# Allegro board msd_foot_ext1.brd
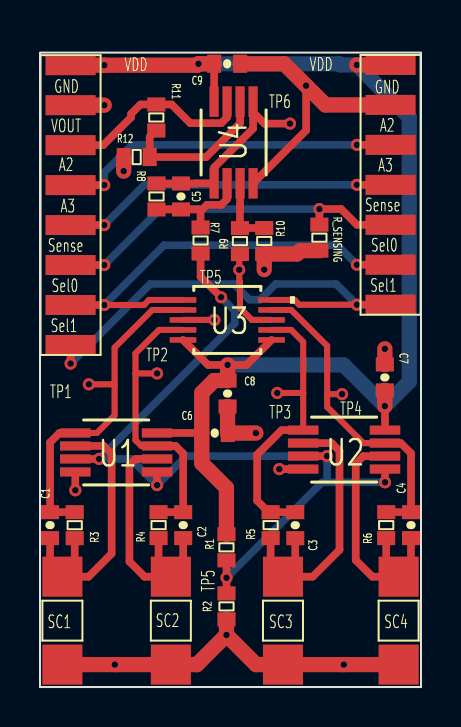
[diagram p0: board, top side]
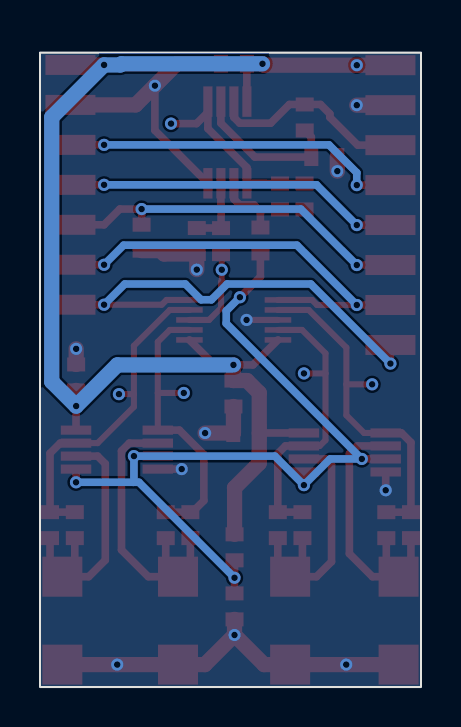
[diagram p1: board, bottom side, seen from below]

Outline 19.05 x 31.75 mm; copper layers: TOP, BOTTOM. Coordinates in mm from the lower left corner of the outline.
Outline path: rectangle 0,0 19.05,31.75

## Design rules (mm)
constraint set DEFAULT: min track width 0.381

## Placement (name value [footprint] x y rotation side)
C1  47pF  [0402-CAP]  0.5 8.1 90 top
C2  47pF  [0402-CAP]  7.16 8.1 90 top
C3  47pF  [0402-CAP]  12.76 8.1 90 top
C4  47pF  [0402-CAP]  18.55 8.1 90 top
C5  470p  [0402-CAP]  7.05 24.55 90 top
C6  0.1u  [0402-CAP]  8.74 12.71 180 top
C7  0.1u  [0402-CAP]  17.24 15.49 270 top
C8  0.1u  [0402-CAP]  9.38 14.69 90 top
C9  0.1uF  [0402-CAP]  9.36 31.19 0 top
IO1  -  [EXT1_MAIN_CONNECTOR]  1.53 24.12 0 top
IO2  -  [EXT1_EXT2_CONNECTOR]  17.53 25.13 0 top
NOREF  -  []  -36.31 -137.95 0 top
NOREF#2  -  []  19.05 0 90 top
NOREF#3  -  []  0.01 31.74 0 top
R1  10k  [0402-RES]  9.32 6.99 90 top
R2  1k  [0402-RES]  9.32 4.04 90 top
R3  20k  [0402-RES]  1.73 8.1 90 top
R4  20k  [0402-RES]  5.93 8.1 90 top
R5  20k  [0402-RES]  11.53 8.1 90 top
R6  20k  [0402-RES]  17.31 8.1 90 top
R7  100k  [0402-RES]  8.03 22.35 270 top
R8  100k  [0402-RES]  5.82 24.55 270 top
R9  100k  [0402-RES]  10 22.32 90 top
R10  120k  [0402-RES]  11.21 22.32 90 top
R11  20k  [0402-RES]  5.81 28.5 270 top
R12  10k  [0402-RES]  4.83 26.52 0 top
R_SENSING  5k  [0402-RES]  13.97 22.49 270 top
SC1  Strain Cell  [STRAIN_CELL]  1.12 3.32 90 top
SC2  Strain Cell  [STRAIN_CELL]  6.54 3.32 90 top
SC3  Strain Cell  [STRAIN_CELL]  12.15 3.32 90 top
SC4  Strain Cell  [STRAIN_CELL]  17.93 3.32 90 top
U1  MCP6002-IMS  [MSOP8_MC_MCH]  3.81 11.74 0 top
U2  MCP6002-IMS  [MSOP8_MC_MCH]  15.2 11.88 0 top
U3  TMUX1104DGSR  [DGS10_TEX]  9.36 18.37 0 top
U4  MCP6002-IMS  [MSOP8_MC_MCH]  9.68 27.25 90 top

## Library data of the parts
C1-C9 = CAP NP
IO1 = EXT1_MAIN_CONNECTOR_0
IO2 = EXT1_EXT2_CONNECTOR_0
R1-R12 R_SENSING = R
SC1-SC4 = Strain Cell
U1 U2 U4 = MCP6002-IMS
U3 = TMUX1104DGSR

## Footprints (pads in the part's own frame, mm; a bottom-side part is the same pattern mirrored in y, then rotated)
0402-CAP
  rect 0.7x0.9 smd: 1(-0.65,0) 2(0.65,0)
0402-RES
  rect 0.7x0.9 smd: 1(-0.65,0) 2(0.65,0)
DGS10_TEX
  rect 1.328x0.279 smd: 1(-2.213,1) 2(-2.213,0.5) 3(-2.213,0) 4(-2.213,-0.5) 5(-2.213,-1) 6(2.213,-1) 7(2.213,-0.5) 8(2.213,0) 9(2.213,0.5) 10(2.213,1)
EXT1_EXT2_CONNECTOR
  rect 2.5x1 smd: 1(0,6) 2(0,4) 3(0,2) 4(0,0) 5(0,-2) 6(0,-4) 7(0,-6)
EXT1_MAIN_CONNECTOR
  rect 2.5x1 smd: 1(0,7) 2(0,5) 3(0,3) 4(0,1) 5(0,-1) 6(0,-3) 7(0,-5) 8(0,-7)
MSOP8_MC_MCH
  rect 1.524x0.457 smd: 1(-2.045,0.975) 2(-2.045,0.325) 3(-2.045,-0.325) 4(-2.045,-0.975) 5(2.045,-0.975) 6(2.045,-0.325) 7(2.045,0.325) 8(2.045,0.975)
STRAIN_CELL
  rect 2x2 smd: 1(-2.2,0) 2(2.2,0)

## Nets
GND: C6.1 C7.1 C8.1 C9.2 IO1.2 IO2.2 R2.1 R10.1 R12.1 R_SENSING.2 SC1.1 SC2.1 SC3.1 SC4.1 U1.4(VSS) U2.4(VSS) U3.3 U4.4(VSS)
VDD: C6.2 C7.2 C8.2 C9.1 IO1.1(VDD) IO2.1(VDD) R1.2 U1.8 U2.8 U3.5 U3.6(VDD) U4.8
CNC: IO1.6 IO2.5 R_SENSING.1
SC1: C1.1 R3.1 SC1.2 U1.2
SC1_VOUT1: C1.2 R3.2 U1.1 U3.2
SC2: C2.1 R4.1 SC2.2 U1.6
SC2_VOUT1: C2.2 R4.2 U1.7 U3.4
SC3: C3.1 R5.1 SC3.2 U2.2
SC3_VOUT1: C3.2 R5.2 U2.1 U3.7
SC4: C4.1 R6.1 SC4.2 U2.6
SC4_VOUT1: C4.2 R6.2 U2.7 U3.9
SEL0: IO1.7 IO2.6 U3.1
SEL1: IO1.8 IO2.7 U3.10
VOUT1: R9.1 U3.8
VOUT2: C5.2 R8.1 U4.1 U4.5
VOUT3: IO1.3 R11.1 U4.7
VREF: R1.1 R2.2 R7.2 U1.3 U1.5 U2.3 U2.5
N23307: IO1.5 IO2.4
N23311: IO1.4 IO2.3
N47220: C5.1 R7.1 R8.2 U4.2
N47300: R11.2 R12.2 U4.6
N47328: R9.2 R10.2 U4.3

## Via types
v1: diameter 0.61, hole 0.33, TOP to BOTTOM, 39 vias

## Routing (per net, layer and track width the routed paths; a pad name or vN(x,y) marks a point on that pad's centre or on a via; arc(x,y) is an arc through that point)
GND: length 46.4
  TOP w0.305: U3.3 v1(8.72,18.37)
  TOP w0.381: U4.4 13.3,27.86 v1(13.3,30.1) ; U1.4 v1(1.77,9.85) ; U2.4 v1(11.97,10.91)
  TOP w0.762: v1(9.32,2.6) 7.84,1.12 SC2.1 v1(3.74,1.12) SC1.1 ; v1(9.32,2.6) 10.81,1.12 SC3.1 v1(15.19,1.12) SC4.1 ; v1(9.32,2.6) R2.1 ; C7.1 v1(17.24,16.93) ; R12.1 v1(4.18,25.82) ; IO2.2 14.27,29.13 v1(13.3,30.1) 12.21,31.19 C9.2 ; IO1.2 v1(3.21,29.12) ; v1(11.21,20.89) R10.1 12.84,21.67 13.01,21.84 R_SENSING.2 ; v1(10.79,12.71) C6.1 9.38,12.72 C8.1
VDD: length 65.7
  TOP w0.381: C6.2 8.08,12.71 U1.8 ; v1(17.24,14.06) 17.25,14.05 U2.8 ; C9.1 8.71,29.3 U4.8 ; U3.5 8.4,16.12 v1(9.38,16.12) 10.33,16.12 U3.6
  TOP w0.762: IO1.1 v1(3.21,31.12) 7.85,31.12 v1(7.93,31.19) C9.1 ; v1(9.38,16.12) C8.2 8.7,15.34 8.09,14.72 C6.2 8.09,11.2 9.32,9.97 R1.2 ; IO2.1 v1(15.85,31.13) ; C7.2 v1(17.24,14.06)
  BOTTOM w0.762: v1(9.38,16.12) 15.18,16.12 v1(17.24,14.06) 18.46,15.28 18.46,28.52 v1(15.85,31.13) 15.03,31.13 14.98,31.19 v1(7.93,31.19)
CNC: length 18.3
  TOP w0.381: IO2.5 15.85,23.13 15.06,23.92 v1(13.97,23.92) R_SENSING.1 ; IO1.6 v1(3.21,21.12)
  BOTTOM w0.381: v1(3.21,21.12) 6.01,23.92 v1(13.97,23.92)
SC1: length 14.3
  TOP w0.381: SC1.2 2.43,5.52 3.58,6.68 3.58,11.67 3.19,12.06 U1.2 ; SC1.2 0.5,6.14 C1.1 ; SC1.2 1.73,6.14 R3.1
SC1_VOUT1: length 17.4
  TOP w0.305: v1(2.44,15.15) 3.73,15.15 ; 3.73,15.15 3.73,13.6 2.84,12.71 U1.1 ; 3.73,15.15 3.73,16.99 5.62,18.87 U3.2
  TOP w0.381: R3.2 0.51,8.75 C1.2 0.5,12.24 0.98,12.71 U1.1
SC2: length 13.1
  TOP w0.381: R4.1 5.93,6.14 SC2.2 ; C2.1 7.16,6.14 SC2.2 ; SC2.2 5.23,5.52 4.47,6.27 4.47,11.11 4.78,11.41 U1.6
SC2_VOUT1: length 15.1
  TOP w0.305: U3.4 5.95,17.87 4.78,16.7 4.78,15.69 ; 4.78,15.69 v1(5.85,15.69) ; 4.78,15.69 4.78,12.35 5.07,12.06 U1.7
  TOP w0.381: U1.7 6.78,12.06 7.16,11.68 C2.2 R4.2
SC3: length 14.7
  TOP w0.381: U2.2 14.58,12.21 14.98,11.81 14.98,6.86 13.63,5.52 SC3.2 ; SC3.2 11.53,6.14 R5.1 ; SC3.2 12.76,6.14 C3.1
SC3_VOUT1: length 14.8
  TOP w0.305: 13.16,14.72 13.16,17.27 12.56,17.87 U3.7 ; 13.16,14.72 v1(11.86,14.72) ; 13.16,14.72 U2.1
  TOP w0.381: U2.1 12.08,12.86 10.86,11.63 10.86,9.33 11.43,8.75 R5.2 11.53,8.75 C3.2
SC4: length 13.3
  TOP w0.381: C4.1 18.55,6.14 SC4.2 ; SC4.2 17.31,6.14 R6.1 ; SC4.2 16.61,5.52 15.79,6.35 15.79,11.17 16.17,11.56 U2.6
SC4_VOUT1: length 16.7
  TOP w0.305: 14.36,14.66 14.36,17.08 12.56,18.87 U3.9 ; 14.36,14.66 14.36,14.02 16.17,12.21 U2.7 ; 14.36,14.66 v1(15.1,14.66)
  TOP w0.381: U2.7 18.04,12.21 18.55,11.7 C4.2 R6.2
SEL0: length 21.7
  TOP w0.305: v1(3.21,19.12) 5.2,19.12 5.45,19.37 U3.1
  TOP w0.381: IO2.6 v1(15.85,21.13) ; IO1.7 v1(3.21,19.12)
  BOTTOM w0.381: v1(15.85,21.13) 14.87,22.11 6.2,22.11 v1(3.21,19.12)
SEL1: length 24
  TOP w0.305: U3.10 12.72,19.37 12.96,19.13 v1(15.85,19.13)
  TOP w0.381: IO2.7 v1(15.85,19.13) ; IO1.8 v1(1.53,16.19)
  BOTTOM w0.381: v1(15.85,19.13) 14.81,20.17 11.78,20.17 11,19.38 10.48,19.38 9.69,20.17 5.51,20.17 v1(1.53,16.19)
VOUT1: length 4.6
  TOP w0.305: R9.1 9.96,21.63 v1(9.96,20.88) 9.96,20.3 10,20.26 10,18.97 10.6,18.37 U3.8
VOUT2: length 9.9
  TOP w0.381: 10.66,28.77 10.66,27.95 8.7,26 U4.1 7.82,25.21 7.82,25.2 C5.2 R8.1 ; 10.66,28.77 11.22,28.2 v1(12.5,28.2) ; 10.66,28.77 U4.5
VOUT3: length 10.1
  TOP w0.381: IO1.3 3.16,27.12 4.56,28.51 4.56,28.69 5.02,29.15 R11.1 6.58,29.15 7.52,28.22 9.07,28.22 9.35,28.51 U4.7
VREF: length 42.9
  TOP w0.381: U1.5 v1(5.85,10.1) ; v1(9.06,19.51) 8.03,20.53 R7.2 ; R1.1 9.32,5.47 v1(9.32,5.47) R2.2 ; U2.5 v1(17.25,10.25) ; U1.3 v1(2.96,11.41) ; U2.3 v1(14.35,11.56)
  BOTTOM w0.381: v1(9.32,5.47) 14.1,10.25 14.38,10.25 ; 14.38,10.25 v1(17.25,10.25) ; 14.38,10.25 14.35,10.28 v1(14.35,11.56) 7.31,11.56 v1(5.85,10.1) 4.54,11.41 v1(2.96,11.41) 9.74,18.19 9.74,18.82 v1(9.06,19.51)
N23307: length 16.8
  TOP w0.381: IO2.4 v1(15.85,25.13) ; IO1.5 v1(3.21,23.12)
  BOTTOM w0.381: v1(3.21,23.12) 5.22,25.13 v1(15.85,25.13)
N23311: length 17.2
  TOP w0.381: IO1.4 v1(3.21,25.12) ; IO2.3 v1(15.85,27.13)
  BOTTOM w0.381: v1(15.85,27.13) 4.6,27.13 3.21,25.74 v1(3.21,25.12)
N47220: length 5.4
  TOP w0.381: 8.03,23.81 8.34,24.13 9.07,24.13 9.35,24.42 U4.2 ; 8.03,23.81 7.94,23.9 C5.1 R8.2 ; 8.03,23.81 R7.1
N47300: length 7.8
  TOP w0.381: U4.6 10.01,28.22 8.31,26.52 R12.2 5.48,27.52 R11.2
N47328: length 3.5
  TOP w0.381: U4.3 10.01,24.13 10,24.12 R9.2 10,22.97 R10.2

## Copper pours and planes (outline as drawn; the poured copper is in the pictures)
GND on BOTTOM: 0.01,31.74 19.04,31.74 19.04,0.01 0.01,0.01

## Text on the board
Ref Des/Silkscreen Top: Sense | TP1 | Sel1 | VOUT | Sel0 | GND | A2 | A3 | VDD | TP2 | TP5 | TP6 | TP3 | TP4
XSECTION_CHART: *  SURFACE | L1 TOP CONDUCTOR | *  DIELECTRIC | L2 BOTTOM CONDUCTOR | DESIGN CROSS SECTION CHART | ___________________________ | TOTAL THICKNESS 0.26416 MM | 1-2
DIMENSION: FIGURE | FINISHED_SIZE | 13.0 | DRILL CHART: TOP to BOTTOM | ALL UNITS ARE IN MILS | PLATED | QTY | 39
